# EAGLE board Busboard v11 power sandwitch (EAGLE 7.3.0)
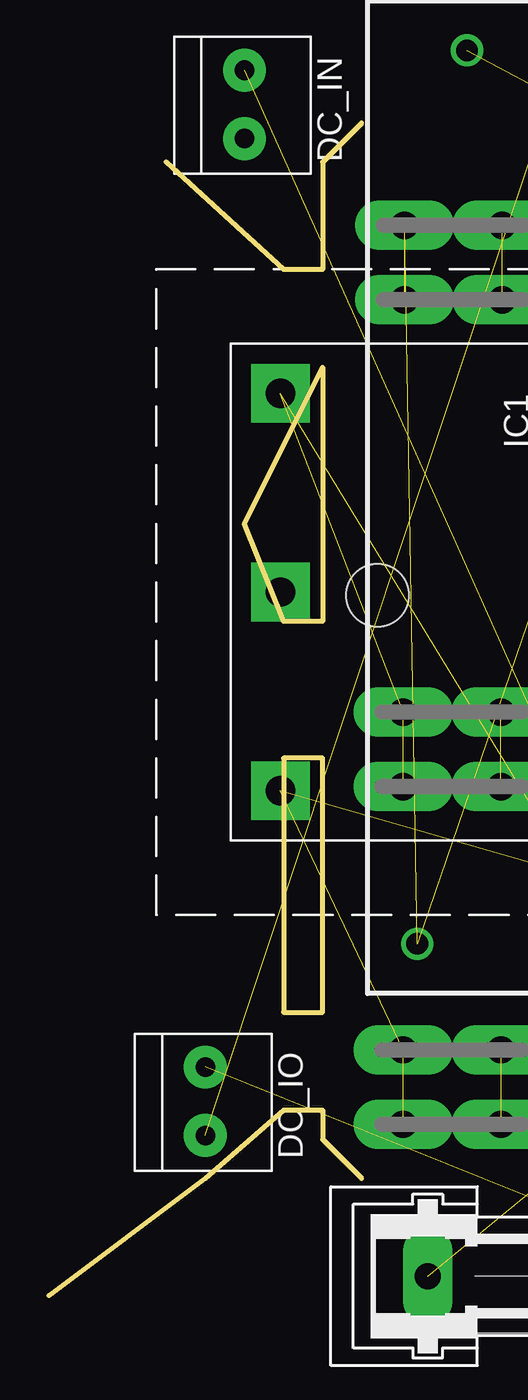
[diagram p0: board, top side]
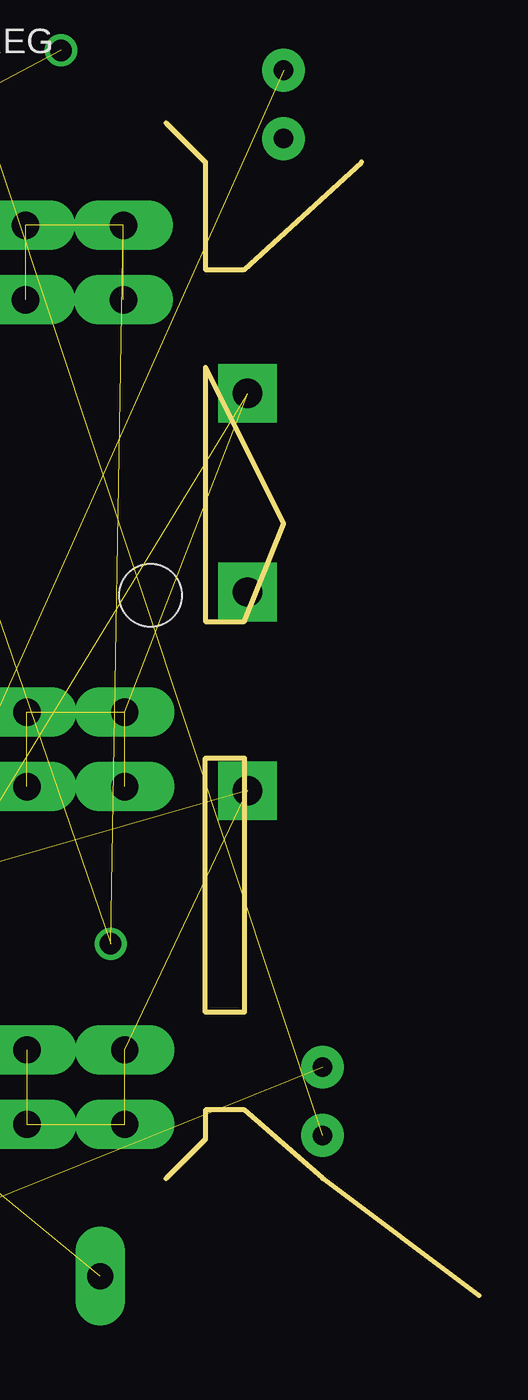
[diagram p1: board, bottom side, seen from below]

Size 16 x 60 mm. Coordinates in mm from the lower left corner, seen from the top.
Outline: 16,60 14,58 14,52.5 12,52.5 6,58
Outline: 0,0 8,6 12,9.5 14,9.5 14,8 16,6
Outline: 12,14.5 14,14.5 14,27.5 12,27.5 12,14.5
Outline: 10,39.5 14,47.5 14,34.5 12,34.5 10,39.5
Copper layers (1*16): Top 0.035mm / dielectric 1.5mm / Bottom 0.035mm
Design rules "default": minimum track width 10mil, minimum drill 24mil, track to track 8mil, track to pad 8mil, pad to pad 8mil, via to via 8mil, smd to smd 8mil, copper to edge 40mil, drill to drill 8mil, minimum pad ring 10mil, minimum via ring 8mil, stop-mask expansion 4mil, vias tented up to drill 0mil, thermal gap 10mil
Holes 3.2 mm at 51.94,9 46.81,55.84 -28,55 16.81,35.84

## Footprints (pad centres in the part's own frame; a part is rotated, then mirrored left to right if it is on the bottom)
1X2-3.5MM = drill 1 pad 2.184: 1 1.8,0; 2 -1.7,0
GSH15 = drill 1.321 pad 2.54 long: 1 -7.62,0; 2 7.62,0 | hole 2.794: 0,0
THL_20WI_SERIES = drill 1.5 pad 3 square: 1 -2.54,10.16; 2 2.54,10.16; 3 -10.16,-10.16; 4 0,-10.16; 5 10.16,-10.16; 6 10.16,10.16
F061.100 = drill 1.4 pad 2.54 long: A1 -2.5,0; A2 2.5,0
SMT-REF = smd 3.4 x 4.6: 1 2.007,0; 2 -2.007,0
TEN60-2423N = drill 1.1 pad 1.65: 1 -45.72,-7.62; 2 -45.72,-2.54; 3 -45.72,7.62; 4 0,-10.16; 5 0,0; 6 0,10.16

## Placement (x,y rotation side)
DC_IN  1X2-3.5MM  [1X2-3.5MM]  10,61 270 top
DC_IO  1X2-3.5MM  [1X2-3.5MM]  8,10 270 top
F3  [GSH15]  27,1 180 top  (outside the outline)
IC1  [THL_20WI_SERIES]  22,36 270 top
J1_+15  PIN2F061.100  [F061.100]  20.69,54.76 180 top
J2_+15  PIN2F061.100  [F061.100]  20.69,50.95 180 top
J3_GND  PIN2F061.100  [F061.100]  20.62,29.86 180 top
J4_GND  PIN2F061.100  [F061.100]  20.62,26.05 180 top
J5_-15  PIN2F061.100  [F061.100]  20.62,12.58 180 top
J6_-15  PIN2F061.100  [F061.100]  20.62,8.77 180 top
NOFUSE  [SMT-REF]  34,11 270 bottom  (outside the outline)
NOPOSREG  [SMT-REF]  33.9,56 0 bottom  (outside the outline)
T1  TEN_60-2423N  [TEN60-2423N]  29,18 270 top

## Library data of the parts
DC_IN DC_IO = adafruit
F3 = fuse; MPN: 64900001039; OC_FARNELL: 1271673; OC_NEWARK: 02P0318
IC1 = traco_thl_tel_series; HEAT-SINK: NO
J1_+15 J2_+15 J3_GND J4_GND J5_-15 J6_-15 = con-faston; OC_FARNELL: unknown; OC_NEWARK: unknown
NOFUSE NOPOSREG = resistor-shunt; OC_FARNELL: unknown; OC_NEWARK: unknown
T1 = TEN_60-2423N; DESCRIPTION: TRACOPOWER 60W Isolated DC-DC Converter, Vin 18 36 V dc, Vout 15V dc, I/O isolation 1500V dc; HEIGHT: mm; MANUFACTURER_NAME: Traco Power; MANUFACTURER_PART_NUMBER: TEN 60-2423N; RS_PART_NUMBER: 7882705; SUPPLIER_NAME: RS

## Nets
15IN: J1_+15.A1 J1_+15.A2 J2_+15.A1 J2_+15.A2 NOPOSREG.1 T1.4
-15IN: IC1.5 J5_-15.A1 J5_-15.A2 J6_-15.A1 J6_-15.A2 T1.6
N$10: F3.2 IC1.1 NOFUSE.2 NOPOSREG.2 T1.1
N$11: DC_IN.2 DC_IO.2 F3.1 NOFUSE.1
N$13: IC1.3 J3_GND.A1 J3_GND.A2 J4_GND.A1 J4_GND.A2 T1.5
NEGVIN: DC_IN.1 DC_IO.1 IC1.2 T1.2

## Tracks (layer width: path | path; a pad name or v marks a point on that pad's centre or on a via)
15IN  (5 unrouted)
-15IN  (5 unrouted)
N$1  (via drill 0.6)  (2 unrouted)
  other vias: 53,63 63,63 58.4,63
N$2  (via drill 0.6)  (2 unrouted)
  other vias: 52,33 49,33 46,33
N$3  (via drill 0.6)
  other vias: 55,33
N$4  (via drill 0.6)  (1 unrouted)
  other vias: 61,33 58,33
N$10  (4 unrouted)
N$11  (3 unrouted)
N$13  (5 unrouted)
NEGVIN  (2 unrouted)

## Text on the board
tNames: - | + | + | - | - | +